# EAGLE board breakout (EAGLE 7.2.0)
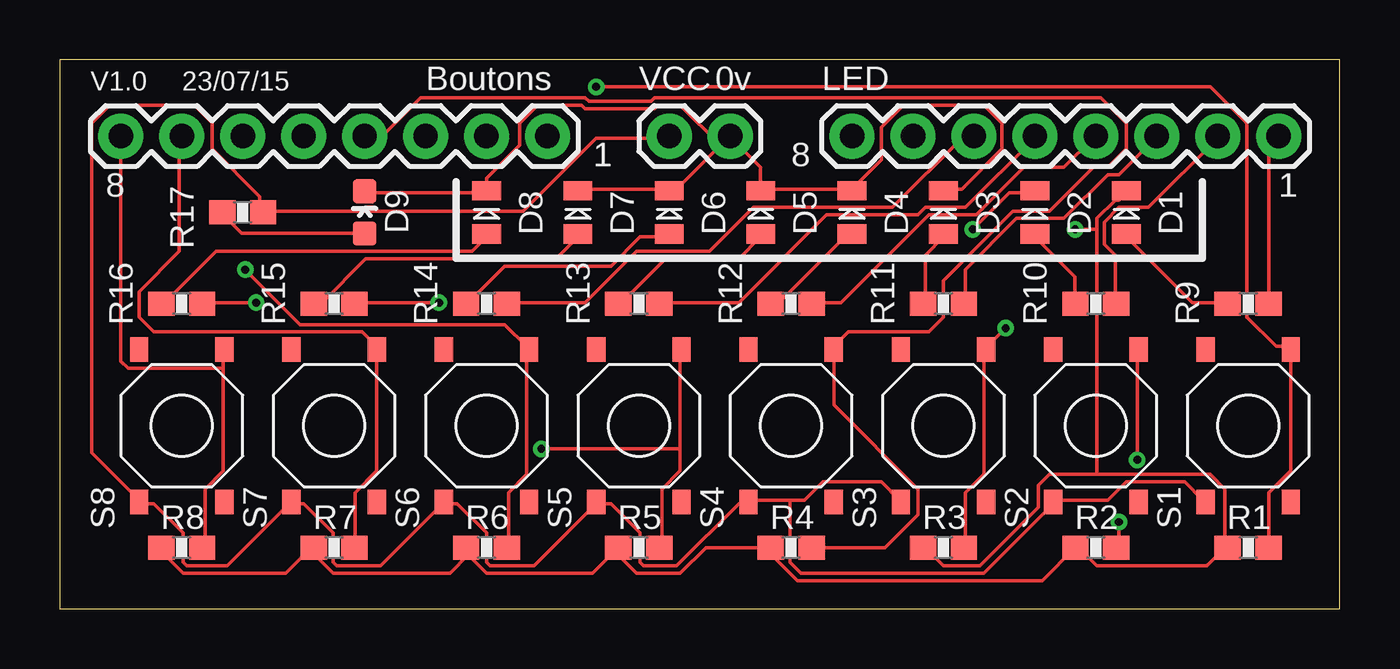
[diagram p0: board, top side]
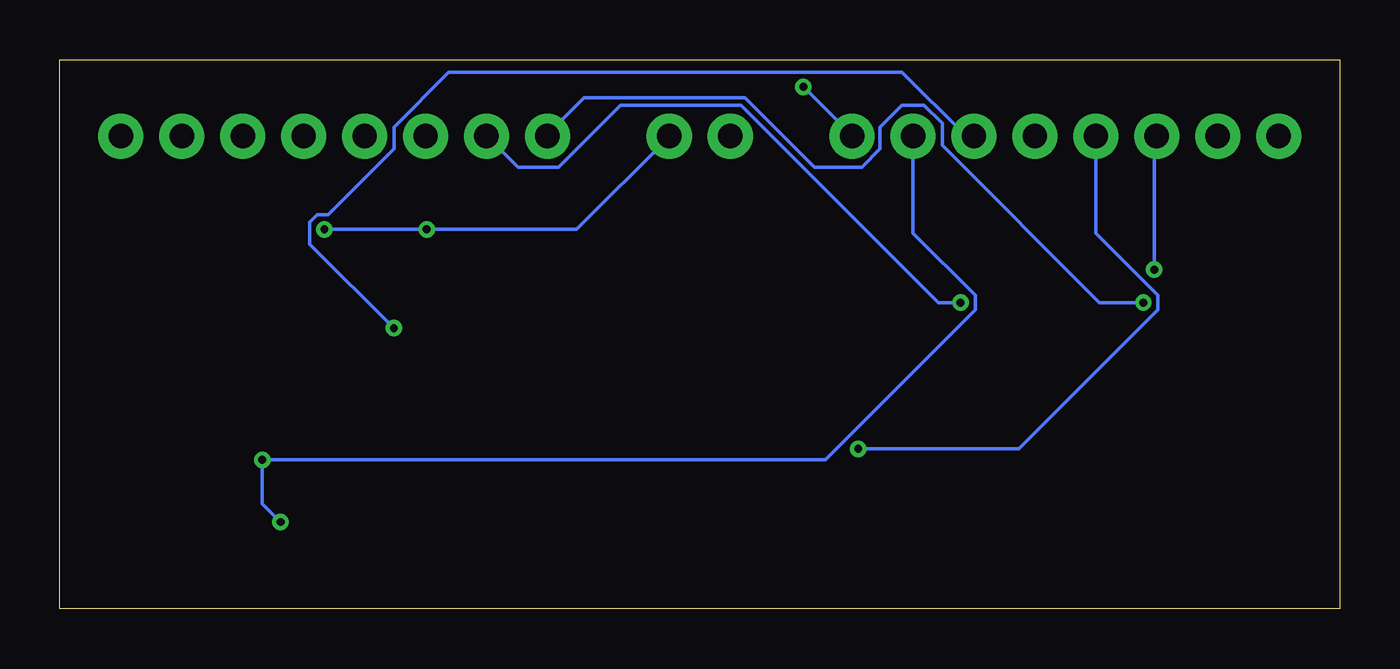
[diagram p1: board, bottom side, seen from below]

Size 53.34 x 22.86 mm. Coordinates in mm from the lower left corner, seen from the top.
Outline: 53.34,0 53.34,22.86 0,22.86 0,0 53.34,0
Copper layers (1*16): Top 0.0356mm / dielectric 1.5011mm / Bottom 0.0356mm
Design rules "LaenPCBOrder": minimum track width 6mil, minimum drill 13mil, track to track 6mil, track to pad 6mil, pad to pad 6mil, via to via 6mil, smd to smd 6mil, copper to edge 15mil, drill to drill 6mil, minimum pad ring 7mil, minimum via ring 7mil, stop-mask expansion 3mil, vias tented up to drill 0mil, thermal gap 10mil

## Footprints (pad centres in the part's own frame; a part is rotated, then mirrored left to right if it is on the bottom)
0805 = smd 0.8 x 1.2: 1 -0.9,0; 2 0.9,0
LED-0603 = smd 1 x 1: A 0,-0.877; C 0,0.877
1X08_ROUND = drill 1.016 pad 1.88: 1 0,0; 2 2.54,0; 3 5.08,0; 4 7.62,0; 5 10.16,0; 6 12.7,0; 7 15.24,0; 8 17.78,0
1X02 = drill 1.016 pad 1.88: 1 0,0; 2 2.54,0
0603-RES = smd 1.1 x 1: 1 -0.85,0; 2 0.85,0
5.2X5.2X1.5-SMD = smd 1.016 x 0.762: P$1 -3.175,1.778; P$2 3.175,1.778; P$3 3.175,-1.778; P$4 -3.175,-1.778

## Placement (x,y rotation side)
D1  Red  [0805]  44.45,16.51 90 top
D2  Red  [0805]  40.64,16.51 90 top
D3  Red  [0805]  36.83,16.51 90 top
D4  Red  [0805]  33.02,16.51 90 top
D5  Red  [0805]  29.21,16.51 90 top
D6  Red  [0805]  25.4,16.51 90 top
D7  Red  [0805]  21.59,16.51 90 top
D8  Red  [0805]  17.78,16.51 90 top
D9  White  [LED-0603]  12.7,16.51 0 top
JP1  [1X08_ROUND]  33.02,19.68 0 top
JP3  [1X08_ROUND]  2.54,19.68 0 top
JP4  [1X02]  25.4,19.68 0 top
R1  75k  [0603-RES]  49.53,2.54 0 top
R2  75k  [0603-RES]  43.18,2.54 0 top
R3  75k  [0603-RES]  36.83,2.54 0 top
R4  75k  [0603-RES]  30.48,2.54 0 top
R5  75k  [0603-RES]  24.13,2.54 0 top
R6  75k  [0603-RES]  17.78,2.54 0 top
R7  75k  [0603-RES]  11.43,2.54 0 top
R8  75k  [0603-RES]  5.08,2.54 0 top
R9  220  [0603-RES]  49.53,12.7 0 top
R10  220  [0603-RES]  43.18,12.7 0 top
R11  220  [0603-RES]  36.83,12.7 0 top
R12  220  [0603-RES]  30.48,12.7 0 top
R13  220  [0603-RES]  24.13,12.7 0 top
R14  220  [0603-RES]  17.78,12.7 0 top
R15  220  [0603-RES]  11.43,12.7 0 top
R16  220  [0603-RES]  5.08,12.7 0 top
R17  100  [0603-RES]  7.62,16.51 0 top
S1  SWITCH_SPSTSMD  [5.2X5.2X1.5-SMD]  49.53,7.62 90 top
S2  SWITCH_SPSTSMD  [5.2X5.2X1.5-SMD]  43.18,7.62 90 top
S3  SWITCH_SPSTSMD  [5.2X5.2X1.5-SMD]  36.83,7.62 90 top
S4  SWITCH_SPSTSMD  [5.2X5.2X1.5-SMD]  30.48,7.62 90 top
S5  SWITCH_SPSTSMD  [5.2X5.2X1.5-SMD]  24.13,7.62 90 top
S6  SWITCH_SPSTSMD  [5.2X5.2X1.5-SMD]  17.78,7.62 90 top
S7  SWITCH_SPSTSMD  [5.2X5.2X1.5-SMD]  11.43,7.62 90 top
S8  SWITCH_SPSTSMD  [5.2X5.2X1.5-SMD]  5.08,7.62 90 top

## Library data of the parts
D1-D9 = Charlie-LED
JP1 JP3 JP4 = SparkFun-Connectors
R1-R17 = Charlie-Resistances
S1-S8 = Charlie-Switch

## Nets
+D1: JP1.8 R9.2
+D2: JP1.7 R10.2
+D3: JP1.6 R11.2
+D4: JP1.5 R12.2
+D5: JP1.4 R13.2
+D6: JP1.3 R14.2
+D7: JP1.2 R15.2
+D8: JP1.1 R16.2
GND: D1.2 D2.2 D3.2 D4.2 D5.2 D6.2 D7.2 D8.2 D9.C JP4.2 R1.1 R2.1 R3.1 R4.1 R5.1 R6.1 R7.1 R8.1
N$1: D1.1 R9.1
N$2: D2.1 R10.1
N$3: D3.1 R11.1
N$4: D4.1 R12.1
N$5: D5.1 R13.1
N$6: D6.1 R14.1
N$7: D7.1 R15.1
N$8: D8.1 R16.1
N$9: D9.A R17.1
OUT1: JP3.8 R1.2 S1.P$3
OUT2: JP3.7 R2.2 S2.P$3
OUT3: JP3.6 R3.2 S3.P$3
OUT4: JP3.5 R4.2 S4.P$3
OUT5: JP3.4 R5.2 S5.P$3
OUT6: JP3.3 R6.2 S6.P$3
OUT7: JP3.2 R7.2 S7.P$3
OUT8: JP3.1 R8.2 S8.P$3
VCC: JP4.1 R17.2 S1.P$1 S2.P$1 S3.P$1 S4.P$1 S5.P$1 S6.P$1 S7.P$1 S8.P$1

## Tracks (layer width: path | path; a pad name or v marks a point on that pad's centre or on a via)
+D1
  Top 0.152: R9.2 50.39,12.75 50.39,19.3 50.7,19.61 JP1.8
+D2
  Top 0.152: R10.2 43.99,12.75 43.99,14.73 43.54,15.19 43.54,16.1 44.14,16.71 45.36,16.71 48.26,19.61 JP1.7
+D3
  Top 0.152: R11.2 37.74,12.75 37.74,14.12 39.88,16.26 41.86,16.26 43.69,18.09 44.14,18.09 45.67,19.61 JP1.6
+D4
  Top 0.152: R12.2 31.34,12.75 32.56,12.75 36.22,16.41 38.2,16.41 40.18,18.39 41.86,18.39 43.08,19.61 JP1.5
+D5
  Top 0.152: R13.2 25.09,12.75 28.3,12.75 31.95,16.41 35.76,16.41 36.07,16.71 37.74,16.71 40.64,19.61 JP1.4
+D6
  Top 0.152: R14.2 18.69,12.75 21.89,12.75 24.03,14.88 27.08,14.88 28.91,16.71 34.7,16.71 37.59,19.61 38.05,19.61 JP1.3
+D7  (via drill 0.33)
  Top 0.152: v15.8,12.75 12.29,12.75 R15.2
  Bottom 0.152: v15.8,12.75 16.71,12.75 24.94,20.98 29.97,20.98 32.56,18.39 34.24,18.39 35.46,19.61 JP1.2
+D8  (via drill 0.33)
  Top 0.152: v8.18,12.75 6.04,12.75 R16.2
  Bottom 0.152: v8.18,12.75 10.01,12.75 16.56,19.3 16.56,20.22 17.32,20.98 18.24,20.98 19.15,20.07 19.15,19.15 19.91,18.39 21.89,18.39 24.79,21.29 31.5,21.29 33.02,19.76 JP1.1
GND  (via drill 0.33)
  Top 0.152: D9.C 12.75,17.32 17.78,17.32 D8.2 17.78,17.93 19.15,19.3 19.15,20.22 19.91,20.98 21.74,20.98 21.89,20.83 24.79,20.83 24.94,20.98 25.86,20.98 27.53,19.3 | 25.4,17.48 21.59,17.48 D7.2 | 29.21,17.48 29.21,18.39 27.99,19.61 JP4.2 | 29.21,17.48 33.02,17.48 | 29.21,17.48 D5.2 | 33.02,17.48 34.24,18.69 34.24,20.07 35.15,20.98 38.51,20.98 39.27,20.22 39.27,19.15 37.59,17.48 36.83,17.48 D3.2 | 33.02,17.48 D4.2 | v38.05,15.8 39.57,17.32 40.64,17.32 D2.2 | 25.4,17.48 25.7,17.48 27.53,19.3 | 27.53,19.3 27.84,19.61 JP4.2 | 25.4,17.48 D6.2 | 27.53,19.3 JP4.2 | R8.1 4.37,2.54 4.37,2.23 5.13,1.47 9.4,1.47 10.46,2.54 R7.1 10.62,2.54 10.62,2.23 11.38,1.47 16.26,1.47 17.02,2.23 | 17.02,2.23 17.02,2.54 R6.1 17.02,2.23 | 17.02,2.23 17.78,1.47 22.2,1.47 23.11,2.39 | 23.11,2.39 23.27,2.54 R5.1 23.11,2.39 | 23.11,2.39 24.03,1.47 25.86,1.47 26.92,2.54 R4.1 29.67,2.54 29.67,2.23 30.73,1.17 40.95,1.17 42.32,2.54 R2.1 42.47,2.54 43.23,1.78 47.8,1.78 48.56,2.54 | 43.23,5.59 47.95,5.59 48.56,4.98 48.56,2.54 | 43.23,5.59 41.25,5.59 40.79,5.13 40.79,4.22 38.35,1.78 36.83,1.78 36.07,2.54 R3.1 | 48.56,2.54 R1.1 | 43.23,5.59 43.23,15.8 | 43.23,15.8 43.23,16.26 43.99,17.02 44.14,17.02 44.45,17.32 D1.2 | 43.23,15.8 v42.32,15.8
  Bottom 0.152: JP4.2 27.99,19.61 31.8,15.8 v38.05,15.8 v42.32,15.8
N$1
  Top 0.152: R9.1 48.56,12.75 47.19,12.75 44.45,15.49 D1.1
N$2
  Top 0.152: R10.1 42.32,12.75 42.32,13.82 40.64,15.49 D2.1
N$3
  Top 0.152: R11.1 36.07,12.75 36.07,14.73 36.83,15.49 D3.1
N$4
  Top 0.152: R12.1 29.67,12.75 29.97,12.75 32.71,15.49 33.02,15.49 D4.1
N$5
  Top 0.152: R13.1 23.42,12.75 25.25,14.58 28.3,14.58 29.21,15.49 D5.1
N$6
  Top 0.152: R14.1 17.02,12.75 18.54,14.28 22.96,14.28 24.18,15.49 25.4,15.49 D6.1
N$7
  Top 0.152: R15.1 10.62,12.75 10.92,12.75 12.75,14.58 20.68,14.58 21.59,15.49 D7.1
N$8
  Top 0.152: R16.1 4.37,12.75 6.5,14.88 17.17,14.88 17.78,15.49 D8.1
N$9
  Top 0.152: D9.A 12.6,15.65 7.57,15.65 6.81,16.41 R17.1
OUT1  (via drill 0.33)
  Top 0.152: R1.2 50.39,2.54 50.39,4.83 51.31,5.74 S1.P$3 51.31,10.92 50.7,10.92 49.48,12.14 49.48,20.22 47.95,21.74 v22.35,21.74
  Bottom 0.152: v22.35,21.74 20.37,19.76 JP3.8
OUT2  (via drill 0.33)
  Top 0.152: v44.91,6.2 44.91,10.77 S2.P$3 | v44.14,3.61 44.14,2.54 R2.2
  Bottom 0.152: v44.14,3.61 44.91,4.37 v44.91,6.2 21.44,6.2 15.19,12.45 15.19,13.06 17.78,15.65 JP3.7
OUT3  (via drill 0.33)
  Top 0.152: R3.2 37.74,2.54 37.74,4.83 38.51,5.59 38.51,10.77 S3.P$3 38.66,10.92 v39.42,11.68
  Bottom 0.152: v39.42,11.68 42.93,15.19 42.93,16.1 42.62,16.41 42.16,16.41 39.42,19.15 39.42,20.07 37.13,22.35 18.24,22.35 15.65,19.76 15.34,19.76 JP3.6
OUT4
  Top 0.152: R4.2 34.39,2.54 35.76,3.91 35.76,4.98 32.26,8.48 S4.P$3 32.26,10.92 32.87,11.53 36.22,11.53 36.83,12.14 36.83,13.67 39.73,16.56 41.25,16.56 43.08,18.39 43.69,18.39 44.45,19.15 44.45,20.22 43.38,21.29 24.79,21.29 24.64,21.13 22.05,21.13 21.89,21.29 15.04,21.29 13.51,19.76 12.75,19.76 JP3.5
OUT5  (via drill 0.33)
  Top 0.152: 25.86,6.65 25.86,5.74 25.09,4.98 25.09,2.54 R5.2 | 25.86,6.65 25.86,10.77 S5.P$3 | 25.86,6.65 v20.07,6.65
  Bottom 0.152: JP3.4 10.16,15.65 7.57,13.06 7.57,12.45 13.36,6.65 v20.07,6.65
OUT6  (via drill 0.33)
  Top 0.152: R6.2 18.69,2.54 18.69,4.83 19.46,5.59 19.46,10.77 S6.P$3 19.46,10.92 18.54,11.84 10.01,11.84 v7.72,14.12
  Bottom 0.152: v7.72,14.12 7.72,19.61 JP3.3
OUT7
  Top 0.152: R7.2 12.29,2.54 12.29,4.83 13.21,5.74 S7.P$3 13.21,10.92 12.6,11.53 3.91,11.53 3.3,12.14 3.3,13.21 4.98,14.88 4.98,19.61 JP3.2
OUT8
  Top 0.152: 6.81,10.01 6.81,5.74 6.04,4.98 6.04,2.54 R8.2 | 6.81,10.01 6.81,10.77 S8.P$3 | JP3.1 2.54,10.31 2.84,10.01 6.81,10.01
VCC
  Top 0.152: JP4.1 25.4,19.61 22.35,19.61 19.3,16.56 8.48,16.56 R17.2 8.33,16.56 8.33,17.17 6.35,19.15 6.35,20.22 5.59,20.98 2.08,20.98 1.32,20.22 1.32,6.5 3.3,4.52 S8.P$1 3.3,4.37 3.91,4.37 5.13,3.15 5.13,1.93 5.28,1.78 6.96,1.78 9.55,4.37 S7.P$1 9.7,4.37 10.16,4.37 11.38,3.15 11.38,1.93 11.53,1.78 13.36,1.78 15.95,4.37 S6.P$1 16.1,4.37 16.56,4.37 17.78,3.15 17.78,1.93 17.93,1.78 19.76,1.78 22.35,4.37 | S1.P$1 47.65,4.52 46.89,5.28 44.45,5.28 43.69,4.52 41.4,4.52 S2.P$1 41.4,4.37 38.51,1.47 30.89,1.47 30.43,1.93 30.43,4.52 | 30.43,4.52 31.04,4.52 31.8,5.28 34.24,5.28 35,4.52 S3.P$1 | 30.43,4.52 28.75,4.52 S4.P$1 28.6,4.37 28.3,4.37 25.7,1.78 24.33,1.78 24.18,1.93 24.18,3.15 22.96,4.37 22.35,4.37 | 22.35,4.37 S5.P$1

## Text on the board
tPlace: V1.0 | 23/07/15 | Boutons | VCC | 0v | LED | 1 | 8 | 8 | 1